# EAGLE board ad_disc (EAGLE 4.16)
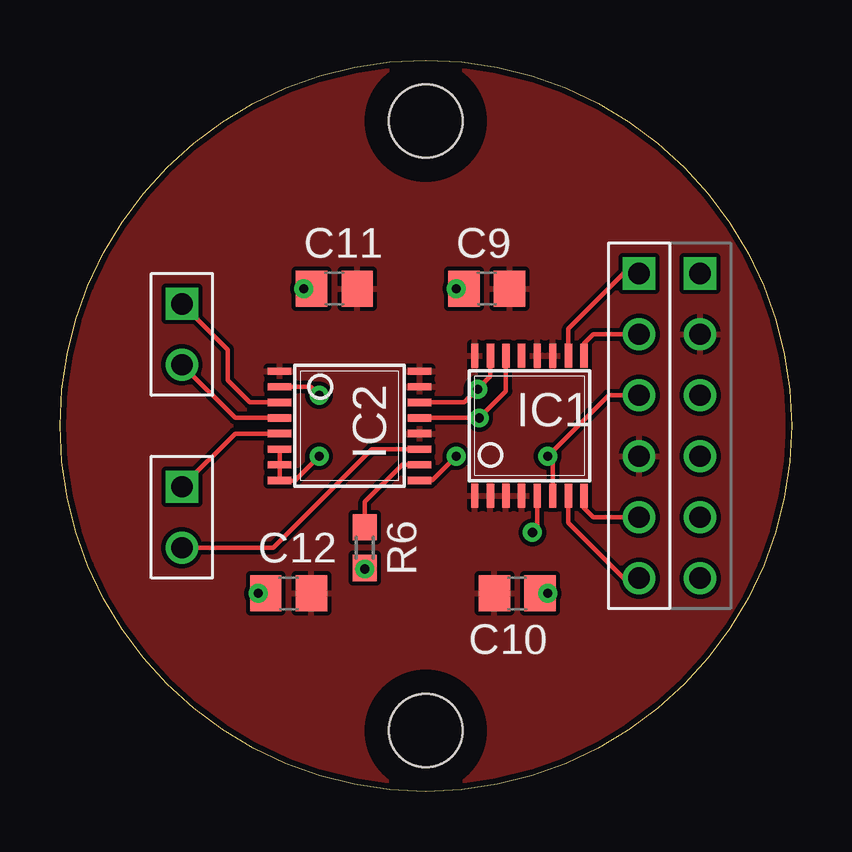
[diagram p0: board, top side]
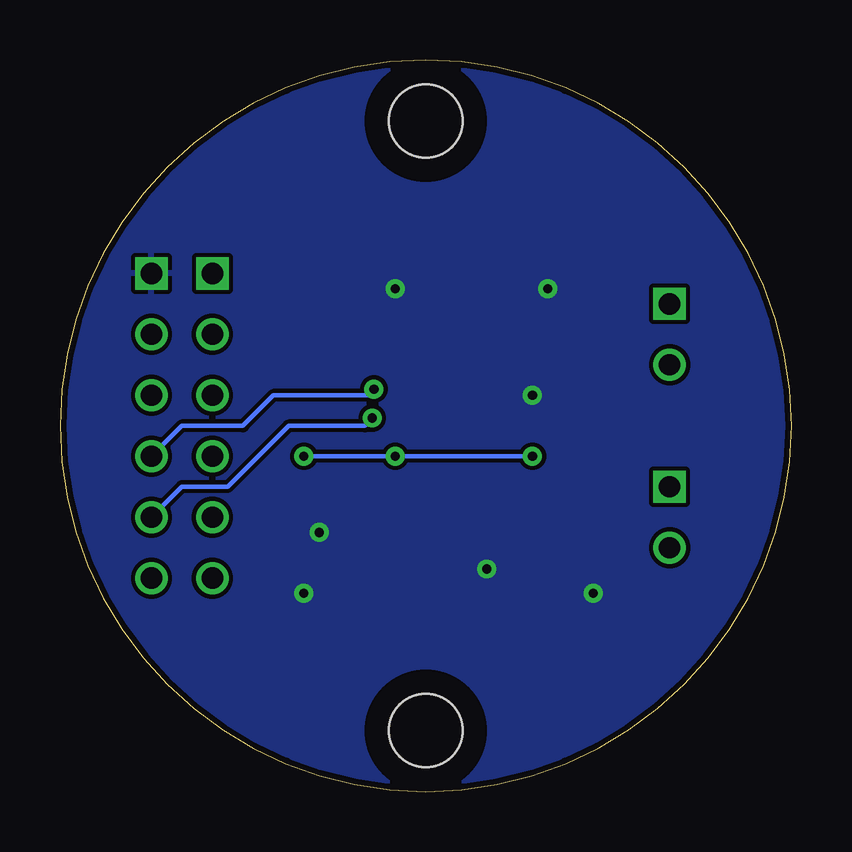
[diagram p1: board, bottom side, seen from below]

Size 30.48 x 30.48 mm. Coordinates in mm from the lower left corner, seen from the top.
Copper layers (1*16): Top 0.035mm / dielectric 1.5mm / Bottom 0.035mm
Design rules "AdvancedCircuts": minimum track width 7mil, minimum drill 15mil, track to track 7mil, track to pad 7mil, pad to pad 7mil, via to via 7mil, smd to smd 0mil, copper to edge 10mil, drill to drill 8mil, minimum pad ring 9mil, minimum via ring 8mil, stop-mask expansion 4mil, vias tented up to drill 0mil, thermal gap 7mil

## Footprints (pad centres in the part's own frame; a part is rotated, then mirrored left to right if it is on the bottom)
C0805 = smd 1.3 x 1.5: 1 -0.95,0; 2 0.95,0
DISC2 = drill 0.889 round: AVCC 11.43,1.27; GND 11.43,3.81; RESET 11.43,-6.35; SCL 11.43,-1.27; SDA 11.43,-3.81 | drill 0.889 square: VCC 11.43,6.35 | hole 3.048: 0,-12.7; 0,12.7
TSSOP16 = smd 0.305 x 0.991: 1 -2.275,-2.918; 2 -1.625,-2.918; 3 -0.975,-2.918; 4 -0.325,-2.918; 5 0.325,-2.918; 6 0.975,-2.918; 7 1.625,-2.918; 8 2.275,-2.918; 9 2.275,2.918; 10 1.625,2.918; 11 0.975,2.918; 12 0.325,2.918; 13 -0.325,2.918; 14 -0.975,2.918; 15 -1.625,2.918; 16 -2.275,2.918
R0603 = smd 1.1 x 1: 1 -0.85,0; 2 0.85,0
HEADER6 = drill 0.889 square: P1 0,6.35 | drill 0.889 round: P2 0,3.81; P3 0,1.27; P4 0,-1.27; P5 0,-3.81; P6 0,-6.35
HEADER1X2 = drill 0.889 square: P1 0,1.27 | drill 0.889 round: P2 0,-1.27

## Placement (x,y rotation side)
C9  [C0805]  17.78,20.95 0 top
C10  [C0805]  19.05,8.25 180 top
C11  [C0805]  11.43,20.95 0 top
C12  [C0805]  9.53,8.25 0 top
CON1  DISC2  [DISC2]  15.24,15.24 0 top
IC1  AD7993  [TSSOP16]  19.56,15.24 0 top
IC2  AD53X6  [TSSOP16]  12.07,15.24 270 top
R6  [R0603]  12.7,10.16 90 top
U$1  HEADER6  [HEADER6]  24.13,15.24 0 top
U$2  HEADER1X2  [HEADER1X2]  5.08,19.05 0 top
U$3  HEADER1X2  [HEADER1X2]  5.08,11.43 0 top

## Library data of the parts
C9-C12 R6 = rcl
CON1 IC1 U$1-U$3 = anton
IC2 = anton2

## Nets
AD0: IC1.10 U$1.P1
AD1: IC1.9 U$1.P2
AD2: IC1.8 U$1.P5
AD3: IC1.7 U$1.P6
AVCC: IC1.6 IC2.6 IC2.7 IC2.8 IC2.9 U$1.P3
DAC0: IC2.3 U$2.P1
DAC1: IC2.4 U$2.P2
DAC2: IC2.5 U$3.P1
DAC3: IC2.11 U$3.P2
GND: C9.2 C10.2 C11.2 C12.2 CON1.GND IC1.1 IC1.2 IC1.3 IC1.4 IC1.11 IC1.12 IC1.16 IC2.1 IC2.12 IC2.15 IC2.16 U$1.P4
N$3: CON1.AVCC
PD: IC2.10 R6.2
RESET: CON1.RESET
SCL: CON1.SCL IC1.15 IC2.14
SDA: CON1.SDA IC1.14 IC2.13
VCC: C9.1 C10.1 C11.1 C12.1 CON1.VCC IC1.5 IC2.2 R6.1

## Tracks (layer width: path | path; a pad name or v marks a point on that pad's centre or on a via)
AD0
  Top 0.178: IC1.10 21.18,19.28 23.5,21.59 U$1.P1
AD1
  Top 0.178: IC1.9 21.83,18.66 22.23,19.05 U$1.P2
AD2
  Top 0.178: IC1.8 21.83,11.82 22.23,11.43 U$1.P5
AD3
  Top 0.178: IC1.7 21.18,11.2 23.5,8.89 U$1.P6
AVCC  (via drill 0.38)
  Top 0.178: IC2.7 9.15,13.59 9.14,13.59 | IC2.7 IC2.6 | IC2.8 | IC2.8 IC2.7 | IC2.8 | U$1.P3 22.86,16.51 v20.32,13.97 20.53,13.76 IC1.6 | IC2.8 9.78,12.96 v10.79,13.97 | IC2.9 15.51,12.96 v16.51,13.97
  Bottom 0.178: v10.79,13.97 v16.51,13.97 v20.32,13.97
DAC0
  Top 0.178: IC2.3 7.92,16.21 6.99,17.14 6.99,18.41 U$2.P1
DAC1
  Top 0.178: IC2.4 7.29,15.57 U$2.P2
DAC2
  Top 0.178: IC2.5 7.29,14.91 U$3.P1
DAC3
  Top 0.178: U$3.P2 8.89,10.16 13,14.27 IC2.11
GND
  pour Top: 30.48,15.24 arc-90 15.24,0 arc-90 0,15.24 arc-90 15.24,30.48 arc-90
PD
  Top 0.178: R6.2 12.7,12.07 14.25,13.61 IC2.10
SCL  (via drill 0.38)
  Top 0.178: IC2.14 16.85,16.21 v17.4,16.76 17.93,17.3 IC1.15
  Bottom 0.178: CON1.SCL 25.4,15.24 22.86,15.24 21.59,16.51 17.65,16.51 v17.4,16.76
SDA  (via drill 0.38)
  Top 0.178: IC2.13 v17.47,15.57 18.58,16.68 IC1.14
  Bottom 0.178: CON1.SDA 25.4,12.7 23.5,12.7 20.95,15.24 17.78,15.24 17.47,15.55 v17.47,15.57
VCC  (via drill 0.38)
  Top 0.178: C9.1 v16.51,20.95 | C12.1 v8.26,8.25 | R6.1 v12.7,9.27 | IC2.2 10.44,16.86 v10.79,16.51 | IC1.5 19.88,10.99 v19.69,10.79 | C11.1 v10.16,20.95 | C10.1 v20.32,8.25
  pour Bottom: 15.24,30.48 arc-90 30.48,15.24 arc-90 15.24,0 arc-90 0,15.24 arc-90